# EAGLE board Exquisite Blorr (EAGLE 9.7.0)

Size 298.28 x 227.07 mm. Coordinates in mm from the lower left corner, seen from the top.
Outline: 0,0 298.28,0 298.28,227.07 0,227.07 0,0
Copper layers (1*16): Top 0.035mm / dielectric 1.5mm / Bottom 0.035mm
Design rules "default": minimum track width 6mil, minimum drill 0.35mm, track to track 6mil, track to pad 6mil, pad to pad 6mil, via to via 6mil, smd to smd 6mil, copper to edge 40mil, drill to drill 6mil, minimum pad ring 10mil, minimum via ring 8mil, stop-mask expansion 4mil, vias tented up to drill 0mil, thermal gap 10mil

## Footprints (pad centres in the part's own frame; a part is rotated, then mirrored left to right if it is on the bottom)
LEDRD254W60D565H860B = drill 0.981 pad 1.581: 1 -1.27,0; 2 1.27,0
1X08 = drill 1.016 long: 1 -8.89,0; 2 -6.35,0; 3 -3.81,0; 4 -1.27,0; 5 1.27,0; 6 3.81,0; 7 6.35,0; 8 8.89,0
RESAD1016W63L850D250B = drill 0.83 pad 1.43: 1 -5.08,0; 2 5.08,0
HA-06-SM065 = drill 1 pad 1.676: 1 -2.54,-2.54; 2 0,2.54; 3 2.54,-2.54
SG90 = drill 1.016 long: 1 -2.54,0; 2 0,0; 3 2.54,0
ARDUINO-UNO-R3-SHIELD = drill 1.016 pad 1.88: 3.3V 24.13,-2.54; 5V 24.13,0; A0 24.13,12.7; A1 24.13,15.24; A2 24.13,17.78; A3 24.13,20.32; A4 24.13,22.86; A5 24.13,25.4; AREF -24.13,-13.97; D2 -24.13,20.32; D3 -24.13,17.78; D4 -24.13,15.24; D5 -24.13,12.7; D6 -24.13,10.16; D7 -24.13,7.62; D8 -24.13,3.81; D9 -24.13,1.27; D10 -24.13,-1.27; D11 -24.13,-3.81; D12 -24.13,-6.35; D13 -24.13,-8.89; GND@0 24.13,2.54; GND@1 24.13,5.08; GND@2 -24.13,-11.43; IOREF 24.13,-7.62; NC 24.13,-10.16; RES 24.13,-5.08; RX -24.13,25.4; SCL -24.13,-19.05; SDA -24.13,-16.51; TX -24.13,22.86; VIN 24.13,7.62
JHD-162A = drill 1.016 long: 1 -19.05,0; 2 -16.51,0; 3 -13.97,0; 4 -11.43,0; 5 -8.89,0; 6 -6.35,0; 7 -3.81,0; 8 -1.27,0; 9 1.27,0; 10 3.81,0; 11 6.35,0; 12 8.89,0; 13 11.43,0; 14 13.97,0; 15 16.51,0; 16 19.05,0

## Placement (x,y rotation side)
D3  RED  [LEDRD254W60D565H860B]  9.47,138.27 180 top
KEYPAD3  KEYPAD-4X4  [1X08]  6.27,167.63 90 top
R5  330  [RESAD1016W63L850D250B]  258.31,198.26 90 top
R6  330  [RESAD1016W63L850D250B]  8.2,133.19 90 top
RPOT4  250k  [HA-06-SM065]  268.03,220.02 0 top
SERVO3  SERVOSG90  [SG90]  291.3,92.91 90 top
U7  ARDUINO-UNO-R3-SHIELD  [ARDUINO-UNO-R3-SHIELD]  85.08,140.86 0 top
U8  LCD-16X2JHD-162A  [JHD-162A]  239.26,183.15 0 top
U9  ARDUINO-UNO-R3-SHIELD  [ARDUINO-UNO-R3-SHIELD]  90.37,47.88 0 top

## Library data of the parts
D3 = Tinkercad; CATEGORY: Opto-Electronic; SUB-CATEGORY: LED; VALUE: LED_RED
KEYPAD3 R5 R6 RPOT4 SERVO3 U7-U9 = Tinkercad

## Nets
D3_C: D3.2 R6.2
U7_5V: RPOT4.3 SERVO3.2 U7.5V U8.2 U8.15 U9.5V
U7_A0: U7.A0 U8.4
U7_A1: U7.A1 U8.6
U7_A2: U7.A2 U8.11
U7_A3: U7.A3 U8.12
U7_A4: U7.A4 U8.13
U7_A5: U7.A5 U8.14
U7_D2: KEYPAD3.1 U7.D2
U7_D3: KEYPAD3.2 U7.D3
U7_D4: KEYPAD3.3 U7.D4
U7_D5: KEYPAD3.4 U7.D5
U7_D6: KEYPAD3.5 U7.D6
U7_D7: KEYPAD3.6 U7.D7
U7_D8: KEYPAD3.7 U7.D8
U7_D9: KEYPAD3.8 U7.D9
U7_GND: R5.2 R6.1 RPOT4.1 SERVO3.1 U7.GND@0 U7.GND@1 U7.GND@2 U8.1 U8.5 U9.GND@0 U9.GND@1 U9.GND@2
U7_RX: U7.RX U9.TX
U8_LED-: R5.1 U8.16
U8_VO: RPOT4.2 U8.3
U9_D9: SERVO3.3 U9.D9
U9_RX: U7.TX U9.RX

## Tracks (layer width: path | path; a pad name or v marks a point on that pad's centre or on a via)
D3_C  (1 unrouted)
U7_5V  (5 unrouted)
U7_A0  (1 unrouted)
U7_A1  (1 unrouted)
U7_A2  (1 unrouted)
U7_A3  (1 unrouted)
U7_A4  (1 unrouted)
U7_A5  (1 unrouted)
U7_D2  (1 unrouted)
U7_D3  (1 unrouted)
U7_D4  (1 unrouted)
U7_D5  (1 unrouted)
U7_D6  (1 unrouted)
U7_D7  (1 unrouted)
U7_D8  (1 unrouted)
U7_D9  (1 unrouted)
U7_GND  (11 unrouted)
U7_RX  (1 unrouted)
U8_LED-  (1 unrouted)
U8_VO  (1 unrouted)
U9_D9  (1 unrouted)
U9_RX  (1 unrouted)